# EAGLE board ESP_CO2_V0.30 (EAGLE 9.6.2)
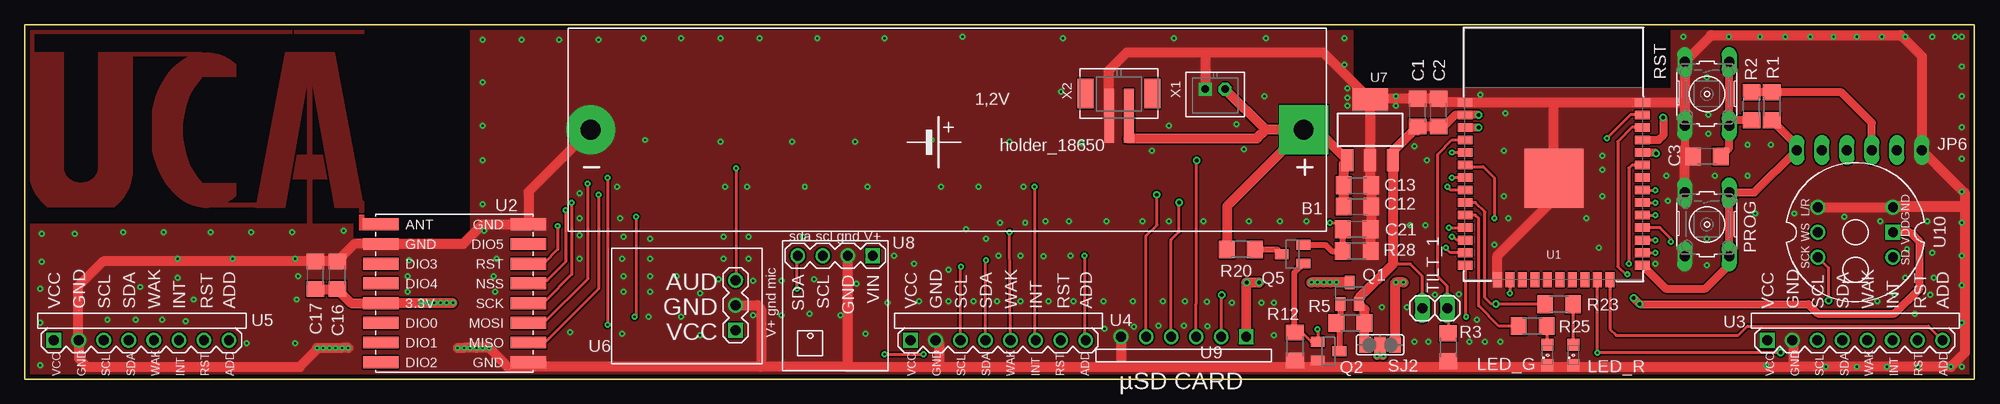
[diagram p0: board, top side]
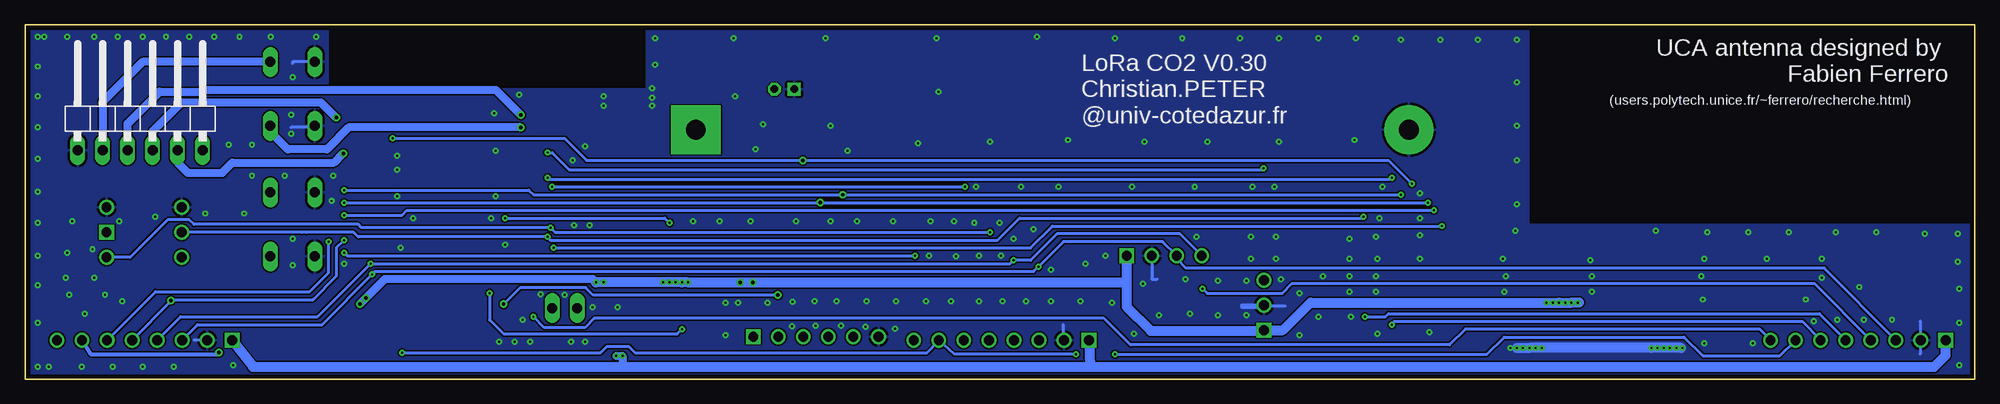
[diagram p1: board, bottom side, seen from below]

Size 197.94 x 36 mm. Coordinates in mm from the lower left corner, seen from the top.
Outline: 0,0 197.94,0 197.94,36 0,36 0,0
Copper layers (1*16): Top 0.035mm / dielectric 1.5mm / Bottom 0.035mm
Design rules "default *": minimum track width 6mil, minimum drill 0.2mm, track to track 6mil, track to pad 6mil, pad to pad 6mil, via to via 6mil, smd to smd 6mil, copper to edge 0.4mm, drill to drill 6mil, minimum pad ring 10mil, minimum via ring 8mil, stop-mask expansion 4mil, vias tented up to drill 0mil, thermal gap 10mil

## Footprints (pad centres in the part's own frame; a part is rotated, then mirrored left to right if it is on the bottom)
18650 = drill 2 pad 5 square: + -36.2,0 | drill 2 pad 5: - 36.2,0
C1206 = smd 1.6 x 1.8: 1 -1.4,0; 2 1.4,0
1X06/90 = drill 1.016 long: 1 -6.35,-3.81; 2 -3.81,-3.81; 3 -1.27,-3.81; 4 1.27,-3.81; 5 3.81,-3.81; 6 6.35,-3.81
SML0805 = smd 1.2 x 1.2: A 1.05,0; C -1.05,0
B3F-10XX = drill 1.016 long: 1 -3.251,2.261; 2 3.251,2.261; 3 -3.251,-2.261; 4 3.251,-2.261
SOT23 = smd 1 x 1.4: 1 -0.95,-1.1; 2 0.95,-1.1; 3 0,1.1
R1206 = smd 1.6 x 1.803: 1 -1.422,0; 2 1.422,0
SJ_2 = smd 1.168 x 1.6: 1 -1.524,0; 2 0,0; 3 1.524,0
1X02 = drill 1.016 long: 1 -1.27,0; 2 1.27,0
ESP-WROOM-03 = smd 0.9 x 1.5: 1 7.7,9; 2 6.43,9; 3 5.16,9; 4 3.89,9; 5 2.62,9; 6 1.35,9; 7 0.08,9; 8 -1.19,9; 9 -2.46,9; 10 -3.73,9; 11 -5,9; 12 -6.27,9; 13 -7.54,9; 14 -8.81,9; 25 -8.81,-9; 26 -7.54,-9; 27 -6.27,-9; 28 -5,-9; 29 -3.73,-9; 30 -2.46,-9; 31 -1.19,-9; 32 0.08,-9; 33 1.35,-9; 34 2.62,-9; 35 3.89,-9; 36 5.16,-9; 37 6.43,-9; 38 7.7,-9 | smd 1.5 x 0.9: 15 -10.3,5.715; 16 -10.3,4.445; 17 -10.3,3.175; 18 -10.3,1.905; 19 -10.3,0.635; 20 -10.3,-0.635; 21 -10.3,-1.905; 22 -10.3,-3.175; 23 -10.3,-4.445; 24 -10.3,-5.715 | smd 6 x 6: GND 0,0
WIRELESS-LORA-RFM95W#SMD = smd 3.6 x 1.2: A1 -7.5,7; A2 -7.5,5; A3 -7.5,3; A4 -7.5,1; A5 -7.5,-1; A6 -7.5,-3; A7 -7.5,-5; A8 -7.5,-7; B1 7.5,7; B2 7.5,5; B3 7.5,3; B4 7.5,1; B5 7.5,-1; B6 7.5,-3; B7 7.5,-5; B8 7.5,-7
CO2_V = drill 1: ADD 0,-8.839; GND 0,6.401; INT 0,-3.759; RST 0,-6.299; SCL 0,3.861; SDA 0,1.321; WAK 0,-1.219 | drill 1 square: VCC 0,8.941
SON = drill 1: AUD -4.623,-2.438; GND -4.623,0.102 | drill 1 square: VCC -4.623,2.642
SOT223 = smd 1.219 x 2.235: 1 -2.311,-3.099; 2 0,-3.099; 3 2.311,-3.099 | smd 3.6 x 2.2: 4 0,3.099
TEMP-HUM-PRES-BME280-H = drill 1 square: 1 -5.08,3.81 | drill 1: 2 -5.08,1.27; 3 -5.08,-1.27; 4 -5.08,-3.81
CARD-MINI--µSD-READER = drill 1: CS 1.27,12.7; GND 1.27,2.54; MISO 1.27,5.08; MOSI 1.27,10.16; SCK 1.27,7.62 | drill 1 square: VCC 1.27,15.24
SOUND-DETECTOR-INMP441 = drill 1: GND -2.54,3.81; L/R -2.54,-3.81; SCK 2.54,-3.81; SD 2.54,3.81; WS 0,-3.81 | drill 1 square: VDD 0,3.81
B2B-PH-K-S = drill 0.75 pad 1.3 square: 1 1,0 | drill 0.75 pad 1.3 octagon: 2 -1,0
B2B-PH-SM4-TB = smd 1 x 5.5: 1 1,0; 2 -1,0 | smd 1.6 x 3: M1 3.4,-2.25; M2 -3.4,-2.25

## Placement (x,y rotation side)
B1  18650_HOLDER  [18650]  93.66,25.32 180 top
C1  100n  [C1206]  141.45,27.07 90 top
C2  10u  [C1206]  143.59,27.07 90 top
C3  100n  [C1206]  170.81,22.62 180 top
C12  10u  [C1206]  135.33,17.54 0 top
C13  100n  [C1206]  135.33,19.68 0 top
C16  4.7u  [C1206]  31.75,10.56 90 top
C17  100n  [C1206]  29.53,10.56 90 top
C21  10n  [C1206]  135.25,15.24 0 top
JP6  [1X06/90]  186.29,27.07 0 bottom
LED_G  [SML0805]  154.62,2.46 90 top
LED_R  [SML0805]  157.24,2.46 90 top
PROG  [B3F-10XX]  170.81,15.72 270 top
Q1  SI2305CDS  [SOT23]  134.54,8.73 0 top
Q2  BSS131  [SOT23]  132.4,2.86 270 top
Q5  BSS138  [SOT23]  128.75,12.7 90 top
R1  100k  [R1206]  177.4,27.7 270 top
R2  10k  [R1206]  175.34,27.7 90 top
R3  100k  [R1206]  144.54,3.25 270 top
R5  33k  [R1206]  134.62,5.71 0 top
R12  33k  [R1206]  128.98,3.33 270 top
R20  27k  [R1206]  123.51,13.18 180 top
R23  150  [R1206]  155.81,7.62 0 top
R25  100  [R1206]  153.11,5.4 0 top
R28  10k  [R1206]  135.25,13.02 0 top
RST  [B3F-10XX]  170.81,28.97 270 top
SJ2  [SJ_2]  137.64,3.49 180 top
TILT_1  [1X02]  143.19,7.22 180 top
U1  ESP-WROOM-03  [ESP-WROOM-03]  155.26,20.4 90 top
U2  WIRELESS-LORA-RFM95W#SMD  [WIRELESS-LORA-RFM95W#SMD]  43.66,8.73 180 top
U3  CCS811  [CO2_V]  185.9,3.97 90 top
U4  CCS811  [CO2_V]  98.9,3.97 90 top
U5  CCS811  [CO2_V]  11.91,3.97 90 top
U6  SON  [SON]  67.55,7.62 180 top
U7  MIC5239S  [SOT223]  136.6,25.32 0 top
U8  TEMP-HUM-PRES-BME280H  [TEMP-HUM-PRES-BME280-H]  82.31,7.46 270 top
U9  CARD-µSD-ADAPTERMINI  [CARD-MINI--µSD-READER]  108.8,5.59 270 top
U10  SOUND-DETECTOR-INMP441  [SOUND-DETECTOR-INMP441]  185.9,14.92 270 top
X1  B2B-PH-K-S  [B2B-PH-K-S]  120.89,29.45 180 top
X2  B2B-PH-SM4-TB  [B2B-PH-SM4-TB]  111.12,26.75 180 top

## Library data of the parts
B1 = battery_bms
C1-C3 C12 C13 C16 C17 C21 = eagle-ltspice; SPICEMODEL: NONE; SPICEPREFIX: C
JP6 TILT_1 = pinhead
LED_G LED_R = led
PROG RST = switch-omron; MPN: B3F-1000; OC_FARNELL: 176432; OC_NEWARK: 36M3542
Q1 Q2 = transistor-small-signal-perso
Q5 = detect
R1-R3 R5 R12 R20 R23 R25 R28 = eagle-ltspice; SPICEMODEL: NONE; SPICEPREFIX: R
SJ2 = jumper
U1 = esp32-sparkfun (1); OC_FARNELL: unknown
U2 U6 = diy-modules
U3-U5 U8-U10 = diy-modules1.8-perso
U7 = micrel
X1 X2 = con-JST PH

## Nets
+UB: B1.+ C12.1 C13.1 R20.2 U7.1 X1.2 X2.2
ADD1: U1.24 U3.ADD
ADD2: U1.26 U4.ADD
ADD3: U1.14 U5.ADD
ANT: U2.B8
GND: B1.- C1.2 C2.2 C3.2 C12.2 C13.2 C16.2 C17.2 C21.2 JP6.1 LED_G.C LED_R.C PROG.3 PROG.4 Q2.2 R3.2 R12.2 R28.2 RST.3 RST.4 U1.1 U1.15 U1.38 U1.GND U2.A1 U2.A8 U2.B7 U3.GND U4.GND U5.GND U6.GND U7.2 U7.4 U8.2 U9.GND U10.GND U10.L/R X1.1 X2.1
INT1: U1.28 U3.INT
INT2: U1.8 U4.INT
INT3: U1.7 U5.INT
IO0: JP6.6 PROG.1 PROG.2 R1.2 U1.25
LED_G: R25.1 U1.10
LED_R: R23.1 U1.9 U9.CS
MEASURE: Q2.1 Q5.1 R12.1 U1.16
MIC: U1.5 U6.AUD
MISO: U1.31 U2.A2 U9.MISO
MOSI: U1.37 U2.A3 U9.MOSI
N$1: Q1.1 Q2.3 R5.1
N$5: Q5.3 R20.1
N$7: LED_R.A R23.2
N$8: LED_G.A R25.2
NC: U1.32
RFM_NSS: U1.29 U2.A5
RFM_RST: U1.13 U2.A6
RFM_SCK: U1.30 U2.A4 U9.SCK
RST: C3.1 JP6.2 R2.1 RST.1 RST.2 U1.3
RST_CO2: U1.23 U3.RST U4.RST U5.RST
RX: JP6.5 U1.34
SCL: U1.36 U3.SCL U4.SCL U5.SCL U8.3
SDA: U1.33 U3.SDA U4.SDA U5.SDA U8.4
TILT1: R3.1 TILT_1.1 U1.4
TX: JP6.4 U1.35
V+: C16.1 C17.1 Q1.3 SJ2.1 U2.B4 U6.VCC U8.1 U9.VCC U10.VDD
V+CO2: SJ2.2 U3.VCC U4.VCC U5.VCC
VBAT: C21.1 Q5.2 R28.1 U1.6
VCC: C1.1 C2.1 JP6.3 Q1.2 R1.1 R2.2 R5.2 SJ2.3 TILT_1.2 U1.2 U7.3
WAK1: U1.27 U3.WAK U10.SCK
WAK2: U1.11 U4.WAK U10.SD
WAK3: U1.12 U5.WAK U10.WS

## Tracks (layer width: path | path; a pad name or v marks a point on that pad's centre or on a via)
+UB
  Top 1.016: B1.+ 131.19,25.32 U7.1 133.93,21.86 C13.1 C12.1 | B1.+ 122.08,17.54 R20.2 | B1.+ 126.02,25.32 | 126.02,25.32 X1.2 | X2.2 112.12,24.5 112.08,24.45 125.14,24.45 126.02,25.32
ADD1
  Top 0.305: U1.24 160.97,5.08 161.61,4.45 173.99,4.45 174.94,5.4 193.31,5.4 U3.ADD
ADD2  (via drill 0.2)
  Top 0.305: U1.26 v165.58,12.86 | v165.58,12.86 | v107.63,12.54 107.63,4 U4.ADD
  Bottom 0.305: v165.58,12.86 165.26,12.54 v107.63,12.54
ADD3  (via drill 0.2)
  Top 0.305: v146.37,6.35 146.37,11.48 U1.14
  Bottom 0.305: U5.ADD 21.86,5.08 51.75,5.08 53.34,3.49 85.72,3.49 88.42,6.19 140.18,6.19 141.13,5.24 145.26,5.24 v146.37,6.35
ANT1
  pour Top: 0.46,20.73 0.46,35.58 27.16,35.58 27.16,35.08 0.96,35.08 0.96,33.18 3.96,33.18 3.96,21.53 3.97,21.4 3.99,21.26 4.02,21.12 4.07,20.99 4.13,20.86 4.2,20.75 4.28,20.63 4.37,20.52 4.48,20.42 4.59,20.32 4.71,20.24 4.84,20.17 4.97,20.11 5.11,20.05 5.26,20.01 5.41,19.98 5.56,19.96 5.71,19.96 5.86,19.96 6.01,19.98 6.16,20.01 6.31,20.05 6.45,20.11 6.59,20.17 6.71,20.24 6.84,20.32 6.95,20.42 7.05,20.52 7.15,20.63 7.23,20.75 7.3,20.86 7.36,20.99 7.4,21.12 7.43,21.26 7.45,21.4 7.46,21.53 7.46,33.18 17.96,33.18 17.96,33.15 18.57,33.17 19.18,33.11 19.78,32.97 20.38,32.73 20.95,32.4 21.46,32 21.46,30.69 17.96,30.69 17.96,30.55 17.67,30.22 17.4,29.86 17.16,29.5 16.93,29.08 16.73,28.66 16.56,28.22 16.41,27.76 16.28,27.28 16.18,26.8 16.11,26.3 16.07,25.8 16.06,25.3 16.07,24.79 16.11,24.29 16.18,23.8 16.28,23.31 16.41,22.84 16.56,22.37 16.73,21.93 16.93,21.51 17.16,21.1 17.4,20.73 17.67,20.38 17.96,20.04 17.96,19.9 21.46,19.9 21.46,18.59 21.31,18.47 21.15,18.35 20.99,18.23 20.83,18.12 20.67,18.03 20.5,17.93 23.56,17.93 26.46,33.18 31.46,33.18 34.33,18.08 34.46,18.08 34.46,15.58 34.45,15.58 34.45,15.14 33.96,15.14 33.96,17.41 31.46,17.41 29.21,30.11 29.21,22.81 30.26,22.81 30.71,20.32 29.21,20.32 29.21,15.72 29.46,15.72 29.46,15.33 28.46,15.33 28.46,15.72 28.71,15.72 28.71,20.32 27.21,20.32 27.43,21.5 27.6,22.64 27.63,22.64 27.66,22.81 28.71,22.81 28.71,30.11 26.46,17.41 23.46,17.41 23.47,17.48 19.22,17.48 18.68,17.42 18.13,17.43 17.58,17.51 17.04,17.66 16.52,17.89 16.02,18.17 15.53,18.54 15.07,18.96 14.66,19.42 14.26,19.96 13.91,20.55 13.61,21.15 13.34,21.82 13.12,22.52 12.96,23.23 12.96,27.37 13.1,27.97 13.27,28.57 13.49,29.15 13.73,29.69 14,30.21 14.31,30.7 14.64,31.14 14.99,31.56 15.38,31.93 15.78,32.25 16.2,32.53 16.64,32.77 10.96,32.77 10.96,20.73 10.95,20.73 10.89,20.32 10.8,19.91 10.67,19.51 10.49,19.13 10.28,18.76 10.04,18.41 9.76,18.07 9.45,17.76 9.11,17.48 2.31,17.48 1.98,17.76 1.66,18.07 1.38,18.41 1.14,18.76 0.93,19.13 0.76,19.51 0.63,19.91 0.53,20.32 0.47,20.73
ANT2
  pour Top: 27.36,35.08 27.36,35.58 34.46,35.58 34.46,35.08
GND  (via drill 0.2)
  Top 0.305: Q2.2 131.44,1.76 131.44,1.27 | R12.2 128.98,1.35 128.91,1.27 | LED_R.C 157.1,1.27 154.62,1.27 LED_G.C
  Top 0.61: R3.2 144.62,1.75 144.62,1.27
  Top 0.813: RST.4 168.55,23.48 C3.2 | 143.96,28.1 C2.2
  Top 1.016: 168.55,28.1 U1.38 155.42,28.1 | 168.55,28.1 RST.4 | 168.55,28.1 RST.3 171.26,34.92 190.5,34.92 192.64,32.78 JP6.1 197.01,18.89 197.01,2.7 v195.58,1.27 179.55,1.27 | PROG.3 168.55,23.48 | 143.96,28.1 U1.1 155.42,28.1 | C2.2 C1.2 137.27,28.47 U7.4 | 155.42,28.1 155.26,27.94 U1.GND 155.26,18.26 149.54,12.54 U1.15 | U3.GND 179.57,3.7 179.57,1.3 179.55,1.27 | X2.1 110.12,31.39 111.92,33.18 119.86,33.18 | 119.86,33.18 119.89,33.15 X1.1 | 119.86,33.18 131.84,33.18 U7.4 | U7.4 U7.2 136.6,19.82 C13.2 C12.2 136.73,15.32 C21.2 136.66,13.04 R28.2 | 92.86,1.27 111.41,1.27 | 111.41,1.27 128.91,1.27 131.44,1.27 144.62,1.27 154.62,1.27 179.55,1.27 | 51.62,1.27 U2.A1 | 83.5,1.27 74.77,1.27 | 74.77,1.27 51.62,1.27 | v30.32,3.17 29.84,3.17 27.94,1.27 6.35,1.27 5.5,2.12 U5.GND 5.4,4.1 5.4,9.37 7.99,11.96 C17.2 C16.2 33.52,13.73 U2.B7 44.53,13.73 46.53,15.73 U2.A8 51.16,19.01 B1.- | v32.23,3.17 v30.96,3.17 v30.32,3.17 | 51.62,1.27 49.05,1.27 v47.15,3.17 v45.88,3.17 v44.61,3.17 v43.97,3.17 | U8.2 83.58,1.35 83.5,1.27 | U6.GND 74.4,7.52 74.77,7.14 74.77,1.27 | 92.86,1.27 92.86,3.61 U4.GND | 83.5,1.27 92.86,1.27 | v32.86,3.17 v32.23,3.17 | v31.59,3.17 v32.23,3.17 | v29.69,3.17 v30.32,3.17 | U9.GND 111.34,1.34 111.41,1.27 | U10.GND 189.87,17.62 196.95,17.62 196.79,17.46 U10.GND | U10.L/R U10.GND
  Bottom 0.305: v30.96,3.17 29.84,3.17 | RST.4 168.55,25.56 170.97,25.56 | RST.3 170.81,32.22 170.81,32.07 | U4.GND 92.55,3.97 92.55,5.56 | U6.GND 74.45,7.52 74.45,7.3 72.17,7.3 U6.GND | U6.GND 72.17,7.46 70.01,7.46 | U8.2 83.58,10.16 83.03,10.16 | 5.56,5.87 5.5,5.87 U5.GND 5.56,3.97 5.56,2.54 | U3.GND 180.82,3.97
  Bottom 1.016: 29.84,3.17 v32.86,3.17 v45.24,3.17 v45.88,3.17 v46.51,3.17
  other vias: 173.04,34.77 176.21,34.77 178.75,34.77 181.29,34.77 183.67,34.77 186.06,34.77 188.59,34.77 190.98,34.77 193.68,34.77 196.69,34.77 196.06,34.77 196.69,31.75 196.69,28.73 196.69,25.56 196.69,22.38 196.69,19.05 196.69,15.88 196.69,12.54 196.69,9.53 196.69,5.71 196.69,1.27 192.25,1.27 189.07,1.27 186.06,1.27 182.88,1.27 176.85,1.43 193.2,16.03 188.44,16.03 184.78,16.51 179.71,16.83 175.74,16.83 168.43,34.77 170.81,30.64 170.97,26.83 170.97,24.92 174.94,23.81 177.32,23.81 174.94,20.64 171.61,20.64 170.81,14.29 170.81,11.59 165.58,11.75 166.85,18.1 166.69,20.64 160.18,21.27 160.18,22.7 158.59,16.35 159.86,13.34 160.18,18.57 149.22,13.65 150.65,16.35 150.18,18.57 150.18,23.18 150.34,26.99 147.8,28.89 139.22,28.73 134.3,28.57 133.99,34.61 133.99,31.91 134.3,27.78 139.22,27.78 134.3,29.53 141.13,23.65 142.4,22.23 142.23,15.62 140.64,15.62 143.21,8.58 145.62,8.63 147.48,6.03 146.69,3.81 148.27,3.81 149.86,3.81 142.56,3.81 141.13,3.81 137.79,7.3 140.34,7.3 126.84,4.45 125.57,7.76 120.08,5.37 117.72,5.44 115.12,5.44 112.64,5.35 109.65,5.15 109.54,7.94 112.55,7.94 115.57,7.94 117.83,7.91 120.03,7.86 122.6,7.78 126.84,7.78 124.3,16.03 127.48,16.03 130.18,16.03 119.7,16.03 116.2,16.03 113.51,16.03 109.86,16.03 106.05,16.03 103.66,16.03 103.47,12.5 106.2,12.54 106.52,7.94 103.98,7.94 101.12,7.94 98.74,7.94 96.36,7.94 93.82,7.94 93.82,11.11 97.63,14.29 95.57,15.24 98.9,12.54 101.12,12.54 101.6,15.88 99.06,15.88 101.44,19.53 96.84,19.53 93.03,19.53 90.33,11.75 88.27,12.54 87.63,7.78 90.81,7.94 85.41,4.6 82.87,6.51 84.45,9.68 80.17,10.16 79.69,6.67 73.98,6.51 76.83,6.51 76.83,10 73.98,10 70.48,10.16 66.2,10.48 63.5,10.48 60.8,10.48 60.8,8.89 63.5,8.89 68.58,8.73 66.67,6.35 68.58,4.45 60.64,4.6 63.34,6.35 63.5,12.22 63.5,14.29 70.96,14.45 70.96,12.22 73.5,12.22 73.5,14.45 79.06,14.45 60.8,14.45 60.64,12.22 56.36,12.22 56.36,14.61 56.36,16.35 56.36,18.89 60.48,16.35 60.17,19.53 71.12,19.53 73.34,19.53 79.22,19.53 85.57,19.53 55.4,4.76 47.78,8.89 38.89,8.89 38.89,10.48 47.62,10.48 47.94,12.22 39.05,12.06 46.67,15.08 46.51,17.78 46.51,22.23 46.51,25.72 46.51,30.16 46.51,34.45 50.48,34.45 54.29,34.45 58.26,34.45 62.87,34.61 66.67,34.61 70.64,34.61 74.61,34.61 32.38,15.08 27.15,14.92 23.02,14.92 18.89,14.92 14.13,14.92 10,14.92 5.08,14.76 1.75,14.76 1.75,11.91 1.59,9.21 1.59,5.71 1.59,1.43 8.41,6.03 11.27,6.03 13.97,6.03 16.35,5.87 17.14,8.1 27.62,8.1 27.78,10.48 15.56,10.32 15.56,12.22 11.75,9.37 21.11,12.22 27.46,12.22 22.54,3.65 27.46,3.65 63.02,24.29 70.64,24.13 77.95,24.13 84.3,24.13 92.08,24.29 100.01,24.13 80.49,34.61 87.31,34.61 95.25,34.77 107.31,23.97 114.46,23.18 123.83,23.34 123.03,25.88 116.2,25.72 105.25,29.21 105.41,34.61 116.68,34.61 126.05,34.61 125.89,28.73 193.83,10.32 190.98,10.32 189.87,8.57 193.52,8.57 191.93,6.67 188.12,7.94 191.13,13.18 193.68,12.86
  pour Top (no thermals): 0.48,15.78 33.34,15.78 33.34,14.29 45.24,14.29 45.24,35.56 134.94,35.56 134.94,29.53 167.16,29.53 167.16,35.56 197.49,35.56 197.49,0.48 0.48,0.48
  pour Bottom: 45.24,15.78 45.24,35.56 134.94,35.56 134.94,29.53 167.16,29.53 167.16,35.56 197.48,35.56 197.48,0.48 0.48,0.48 0.47,15.78 0.47,15.78
INT1  (via drill 0.2)
  Top 0.305: 164.47,15.4 166.05,15.4 167.16,14.29 v167.16,13.97 | 164.47,15.4 U1.28 | U1.28 164.46,15.4 164.47,15.4
  Bottom 0.305: U3.INT 184.73,8.89 169.07,8.89 167.16,10.79 v167.16,13.97
INT2  (via drill 0.2)
  Top 0.305: U1.8 | U1.8 144.78,19.21 v144.46,19.53 | v102.55,19.53 102.55,4 U4.INT
  Bottom 0.305: v144.46,19.53 v102.55,19.53
INT3  (via drill 0.2)
  Top 0.305: U1.7 | U1.7 v144.94,20.48 | v59.21,20.48 v59.21,5.56
  Bottom 0.305: U5.INT 17.52,5.87 58.9,5.87 v59.21,5.56 | v144.94,20.48 144.78,20.32 59.37,20.32 v59.21,20.48
IO0
  Top 0.813: R1.2 179.94,23.74 JP6.6 175.65,18.97 PROG.1 PROG.2 173.08,11.63 170.66,9.21 166.64,9.21 U1.25
LED_G
  Top 0.305: R25.1 149.7,5.4 147.64,7.46 147.64,16.35 147.32,16.67 U1.10
LED_R  (via drill 0.35)
  Top 0.305: R23.1 v149.39,7.62 148.91,7.62 148.27,8.26 148.27,16.99 147.32,17.94 U1.9 | U9.CS 121.5,8.49 v121.55,8.53
  Bottom 0.305: v121.55,8.53 140.29,8.53 141.05,9.3 147.71,9.3 v149.39,7.62
MEASURE  (via drill 0.2)
  Top 0.305: v131.29,5.08 v131.3,5.07 Q2.1 130.65,3.81 129.71,4.76 R12.1 | U1.16 v150.81,8.73
  Top 0.61: Q5.1 128.89,10.8 128.89,4.85 R12.1
  Bottom 0.305: v150.81,8.73 150.81,6.03 149.38,4.6 131.76,4.6 v131.29,5.08
MIC  (via drill 0.2)
  Top 0.305: U1.5 | U1.5 v144.94,23.02 | v72.23,21.43 72.23,10.12 U6.AUD
  Bottom 0.305: v144.94,23.02 144.46,23.02 142.72,21.27 72.39,21.27 v72.23,21.43
MISO  (via drill 0.2, 0.35)
  Top 0.305: U1.31 v165.58,19.21 | v165.58,19.21 | v58.26,18.73 58.26,9.21 52.78,3.73 U2.A2 | U9.MISO 113.88,14.55 114.98,15.65 114.98,18.77 114.97,18.79 v114.97,18.73
  Bottom 0.305: v165.58,19.21 146.84,19.21 146.37,18.73 v114.97,18.73 v58.26,18.73
MOSI  (via drill 0.2, 0.35)
  Top 0.305: U1.37 163.04,26.83 v160.66,24.45 | v57.15,19.84 57.15,10.16 52.7,5.71 51.17,5.71 U2.A3 | U9.MOSI 118.96,7.66 | 118.96,7.66 | 118.96,7.66 118.96,22.17 v119.01,22.23
  Bottom 0.305: v160.66,24.45 143.19,24.45 140.97,22.23 v119.01,22.23 59.53,22.23 v57.15,19.84
N$1
  Top 0.61: Q2.3 133.5,5.42 R5.1 133.59,6.11 Q1.1
N$5
  Top 0.61: R20.1 127.17,13.18 Q5.3
N$7
  Top 0.305: LED_R.A R23.2
N$8
  Top 0.305: LED_G.A 154.62,5.31 R25.2
RFM_NSS  (via drill 0.2)
  Top 0.305: U1.29 v165.58,16.67 | v165.58,16.67 | v54.93,17.14 54.93,11.91 53.07,10.05 51.47,10.05 U2.A5
  Bottom 0.305: v165.58,16.67 159.7,16.67 159.23,17.14 v54.93,17.14
RFM_RST  (via drill 0.2)
  Top 0.305: U1.13 144.78,12.86 v144.3,13.34 | v54.13,15.56 54.13,13.18 52.69,11.73 U2.A6
  Bottom 0.305: v54.13,15.56 93.66,15.56 95.89,13.34 v144.3,13.34
RFM_SCK  (via drill 0.2, 0.35)
  Top 0.305: U1.30 v165.58,17.94 | v165.58,17.94 | v55.56,17.94 55.56,10.64 52.86,7.94 51.36,7.94 U2.A4 | U9.SCK 116.42,14.16 117.23,14.97 v117.23,17.94 117.23,17.95
  Bottom 0.305: v165.58,17.94 v117.23,17.94 v55.56,17.94
RST  (via drill 0.35)
  Top 0.813: C3.1 173.08,23.48 RST.2 | R2.1 173.04,26.28 173.04,26.27 173.04,25.76 RST.2 | RST.2 RST.1 | U1.3 v147.64,25.56 | v147.64,25.56
  Bottom 0.813: RST.1 186.06,32.22 190.1,28.18 JP6.2 | v147.64,25.56 165.1,25.56 167.32,23.34 171.29,23.34 173.08,25.12 RST.2
RST_CO2  (via drill 0.2, 0.35)
  Top 0.305: v178.28,2.7 v159.7,2.7 U1.23 | v87.31,2.54 v91.28,2.54
  Bottom 0.305: v159.7,2.7 139.54,2.7 138.91,3.33 136.68,3.33 136.05,2.7 106.37,2.7 U4.RST 103.63,2.54 v91.28,2.54 | v87.31,2.54 49.53,2.54 47.78,4.29 29.53,4.29 27.62,2.38 19.82,2.38 U5.RST
  Bottom 0.406: U3.RST 191.29,2.54 178.44,2.54 v178.28,2.7
RX  (via drill 0.35)
  Top 0.813: v165.66,22.94 165.58,23.02 U1.34
  Bottom 0.813: JP6.5 182.48,21.99 181.45,20.95 177.96,20.95 176.93,21.99 166.61,21.99 v165.66,22.94
SCL  (via drill 0.2)
  Top 0.305: U1.36 | U1.36 163.19,25.56 161.77,24.13 161.77,11.43 162.56,10.64 v162.72,10.64 | U4.SCL 95.04,11.38 v95.09,11.43
  Bottom 0.305: U3.SCL 180.46,5.54 180.46,5.56 167.8,5.56 v162.72,10.64 162.4,10.95 95.57,10.95 v95.09,11.43 92.55,13.97 82.47,13.97 U8.3 81.04,12.22 80.09,11.27 15.29,11.27 U5.SCL
SDA  (via drill 0.2)
  Top 0.305: U1.33 | U1.33 163.19,21.75 162.88,21.43 v162.88,11.75 | v78.42,9.21 78.42,12.46 U8.4 | U4.SDA 97.58,12.01 v97.63,12.06
  Bottom 0.305: U3.SDA 182.19,6.36 182.18,6.35 168.28,6.35 v162.88,11.75 97.95,11.75 v97.63,12.06 95.89,12.06 93.19,14.76 80.72,14.76 U8.4 | U5.SDA 16.24,9.68 69.37,9.68 70.33,8.73 77.95,8.73 v78.42,9.21
TILT1
  Top 0.305: R3.1 144.54,7.14 TILT_1.1 144.46,9.46 143.51,10.42 143.51,22.86 144.94,24.29 U1.4
TX  (via drill 0.35)
  Top 0.813: U1.35 165.92,24.29 166.37,24.73 v166.37,26.59
  Bottom 0.813: JP6.4 185.02,25.16 182.09,28.1 167.96,28.1 166.41,26.55 v166.37,26.59
V+  (via drill 0.2, 0.35)
  Top 0.305: v124.08,9.84 v125.34,9.84
  Top 0.61: v43.5,7.78 43.45,7.73 | v133.19,9.84 v133.18,9.83 v132.56,9.83 | v132.56,9.84 132.54,9.83 v131.92,9.83 | v40.32,7.78 40.27,7.73 40.16,7.73 | v131.92,9.84 v131.91,9.83 v131.29,9.83
  Top 0.813: v163.35,8.26 v163.99,7.62 181.13,7.62 182.09,6.67 189.87,6.67 192.41,9.21 192.41,13.97 191.45,14.92 U10.VDD
  Top 1.016: C17.1 C16.1 33.18,7.73 U2.B4 40.16,7.73 43.45,7.73 | Q1.3 v132.56,9.83 v131.92,9.83 v131.29,9.83 130.66,9.83 v130.65,9.84 | v140.02,9.84 v139.22,9.84 139.16,9.78 SJ2.1 | U9.VCC 124.05,4.34 124.05,9.84 v125.34,9.84 v125.35,9.84
  Bottom 0.61: v131.92,9.84 v131.29,9.84 | v42.86,7.78 v42.23,7.78 | v41.59,7.78 v40.96,7.78 | v40.32,7.78 40.16,7.78
  Bottom 0.813: v140.02,9.84 140.34,10.16 161.45,10.16 v163.99,7.62
  Bottom 1.016: U8.1 86.12,9.84 | 86.12,9.84 86.12,7.38 83.66,4.92 72.23,4.92 U6.VCC 70.27,4.98 67.47,7.78 v42.23,7.78 v40.96,7.78 40.16,7.78 | v140.02,9.84 v131.29,9.84 v130.65,9.84 v125.35,9.84 86.12,9.84
V+CO2  (via drill 0.2)
  Top 0.508: SJ2.2 137.95,3.49 v137.95,2.38
  Top 0.813: v137.95,2.38 v137.32,2.38
  Bottom 0.813: v137.95,2.38 v137.32,2.38 137.32,1.27
  Bottom 1.016: U3.VCC 174.84,1.27 137.32,1.27 89.84,1.27 | U4.VCC 89.84,1.27 | 89.84,1.27 4.13,1.27 2.96,2.43 U5.VCC
VBAT  (via drill 0.2)
  Top 0.305: U1.6 146.42,21.59 148.11,21.59 149.22,20.48 v149.22,16.35 | v132.56,15.88 133.18,15.88 133.83,15.22
  Top 0.61: Q5.2 132.08,13.65 132.72,13.02 R28.1 133.83,15.22 C21.1 | U1.6
  Bottom 0.305: v149.22,16.35 133.03,16.35 v132.56,15.88
VCC  (via drill 0.35)
  Top 0.305: TILT_1.2 141.92,10.48 140.71,11.69 138.92,11.69
  Top 0.813: JP6.3 187.56,26.04 184.47,29.12 R1.1 R2.2 | v147.64,26.83 U1.2 145.26,26.83 144.09,25.67 C2.1
  Top 1.016: 141.45,25.24 C1.1 | C1.1 C2.1 | SJ2.3 136.04,3.49 R5.2 136.04,7.08 Q1.2 135.49,8.27 138.92,11.69 U7.3 138.92,23.14 C1.1
  Bottom 0.813: JP6.3 187.56,25.96 184.31,29.21 180.18,29.21 180.02,29.37 150.18,29.37 v147.64,26.83
WAK1  (via drill 0.2, 0.35)
  Top 0.305: v165.58,14.13 U1.27 | 183.14,8.19 v183.14,7.99 183.14,11.32 U10.SCK
  Bottom 0.305: U3.WAK v183.14,7.99 183.03,8.05 183.06,8.1 168.75,8.1 166.37,10.48 166.37,13.34 v165.58,14.13
WAK2  (via drill 0.2)
  Top 0.305: U4.WAK v100.01,14.92 | v144.62,15.4 U1.11
  Bottom 0.305: v100.01,14.92 144.15,14.92 v144.62,15.4 163.83,15.4 164.15,15.72 180.82,15.72 181.29,16.19 183.51,16.19 187.32,12.38 U10.SD
WAK3  (via drill 0.2)
  Top 0.305: U1.12 145.41,14.13 145.1,14.45 v144.94,14.45 | v62.07,16.51 62.07,6.35 v61.91,6.35
  Bottom 0.305: U5.WAK 15.78,6.67 59.53,6.67 59.85,6.35 v61.91,6.35 | v62.07,16.51 62.23,16.35 97,16.35 99.22,14.13 144.62,14.13 v144.94,14.45 164.15,14.45 164.62,14.92 169.39,14.92 169.86,14.92 U10.WS
(copper drawn outside any net)
  shapes: Top area x1

## Text on the board
tNames: sda scl gnd V+ | V+ gnd mic | VCC / / GND / / SCL / / SDA / / WAK / / INT / / RST / / ADD | VCC / / GND / / SCL / / SDA / / WAK / / INT / / RST / / ADD | VCC / / GND / / SCL / / SDA / / WAK / / INT / / RST / / ADD
bNames: UCA antenna designed by / Fabien Ferrero | (users.polytech.unice.fr/~ferrero/recherche.html) | LoRa CO2 V0.30 / Christian.PETER / @univ-cotedazur.fr